# EAGLE board Recharging batteries using USB port (EAGLE 7.6.0)

Size 56.82 x 53.33 mm. Coordinates in mm from the lower left corner, seen from the top.
Outline: 0,0 56.82,0 56.82,53.33 0,53.33 0,0
Copper layers (1*16): Top 0.035mm / dielectric 1.5mm / Bottom 0.035mm
Design rules "default": minimum track width 10mil, minimum drill 24mil, track to track 8mil, track to pad 8mil, pad to pad 8mil, via to via 8mil, smd to smd 8mil, copper to edge 40mil, drill to drill 8mil, minimum pad ring 10mil, minimum via ring 8mil, stop-mask expansion 4mil, vias tented up to drill 0mil, thermal gap 10mil

## Footprints (pad centres in the part's own frame; a part is rotated, then mirrored left to right if it is on the bottom)
DC-POWER = drill 0.889 pad 2.54 octagon: + 0,2.54; - 0,-2.54
LED5MM = drill 0.813 octagon: A -1.27,0; K 1.27,0
USB-A-PCB = smd 7.5 x 1.5: 5V -0.2,-3.5; GND -0.2,3.5 | smd 6.5 x 1: USB_M 0.3,-1; USB_P 0.3,1
0207/10 = drill 0.813 octagon: 1 -5.08,0; 2 5.08,0
M251 = drill 0.813 long: 1 -2.54,0; 2 0,0; 3 2.54,0
TO220 = drill 1.118 long: 1 -2.54,-6.35; 2 0,-6.35; 3 2.54,-6.35 | hole 3.302: 0,11.176

## Placement (x,y rotation side)
BAT1  [DC-POWER]  5,200.58 0 top  (outside the outline)
BAT2  [DC-POWER]  5,98.98 0 top  (outside the outline)
D1  [LED5MM]  5,149.78 0 top  (outside the outline)
D2  [LED5MM]  5,48.18 0 top
D3  [LED5MM]  5,73.58 0 top  (outside the outline)
D4  [LED5MM]  5,162.48 0 top  (outside the outline)
JP1  [USB-A-PCB]  5,22.78 0 top
JP2  [USB-A-PCB]  5,137.08 0 top  (outside the outline)
R2  220‎Ω  [0207/10]  5,60.88 0 top  (outside the outline)
R3  220‎Ω  [0207/10]  5,86.28 0 top  (outside the outline)
R4  220‎Ω  [0207/10]  5,175.18 0 top  (outside the outline)
R5  220‎Ω  [0207/10]  5,187.88 0 top  (outside the outline)
S1  [M251]  5,35.48 0 top
S2  [M251]  5,111.68 0 top  (outside the outline)
U1  [TO220]  5,10.08 0 top
U2  [TO220]  5,124.38 0 top  (outside the outline)

## Library data of the parts
BAT1 BAT2 D1-D4 JP1 JP2 R2-R5 S1 S2 U1 U2 = AUTODESK_CIRCUITS_BREADBOARD

## Nets
N$1: BAT1.+ S1.3
N$2: JP1.5V R3.1 U1.3
N$3: S1.2 U1.1
N$4: D2.K JP1.GND
N$5: D3.A R3.2
N$6: D2.A R2.2
N$7: BAT1.- D3.K R2.1 S1.1 U1.2
N$8: D1.K JP2.GND
N$9: S2.2 U2.1
N$10: BAT2.+ S2.3
N$11: JP2.5V R4.1 U2.3
N$12: D1.A R5.2
N$13: D4.A R4.2
N$14: BAT2.- D4.K R5.1 S2.1 U2.2

## Tracks (layer width: path | path; a pad name or v marks a point on that pad's centre or on a via)
N$1  (1 unrouted)
N$2  (2 unrouted)
N$3  (1 unrouted)
N$4  (1 unrouted)
N$5  (1 unrouted)
N$6  (1 unrouted)
N$7  (4 unrouted)
N$8  (1 unrouted)
N$9  (1 unrouted)
N$10  (1 unrouted)
N$11  (2 unrouted)
N$12  (1 unrouted)
N$13  (1 unrouted)
N$14  (4 unrouted)